# Altium PCB TRACKER.PcbDoc
Units mil, origin at the board's own origin, x right, y up, seen from the top; angles counter-clockwise.
Board outline 1250 x 1250 mil, 4 copper layers (Top Layer, MidLayer1, MidLayer2, Bottom Layer), stack 61 mil thick; 54 components, 50 nets, 221 pads, 73 vias.
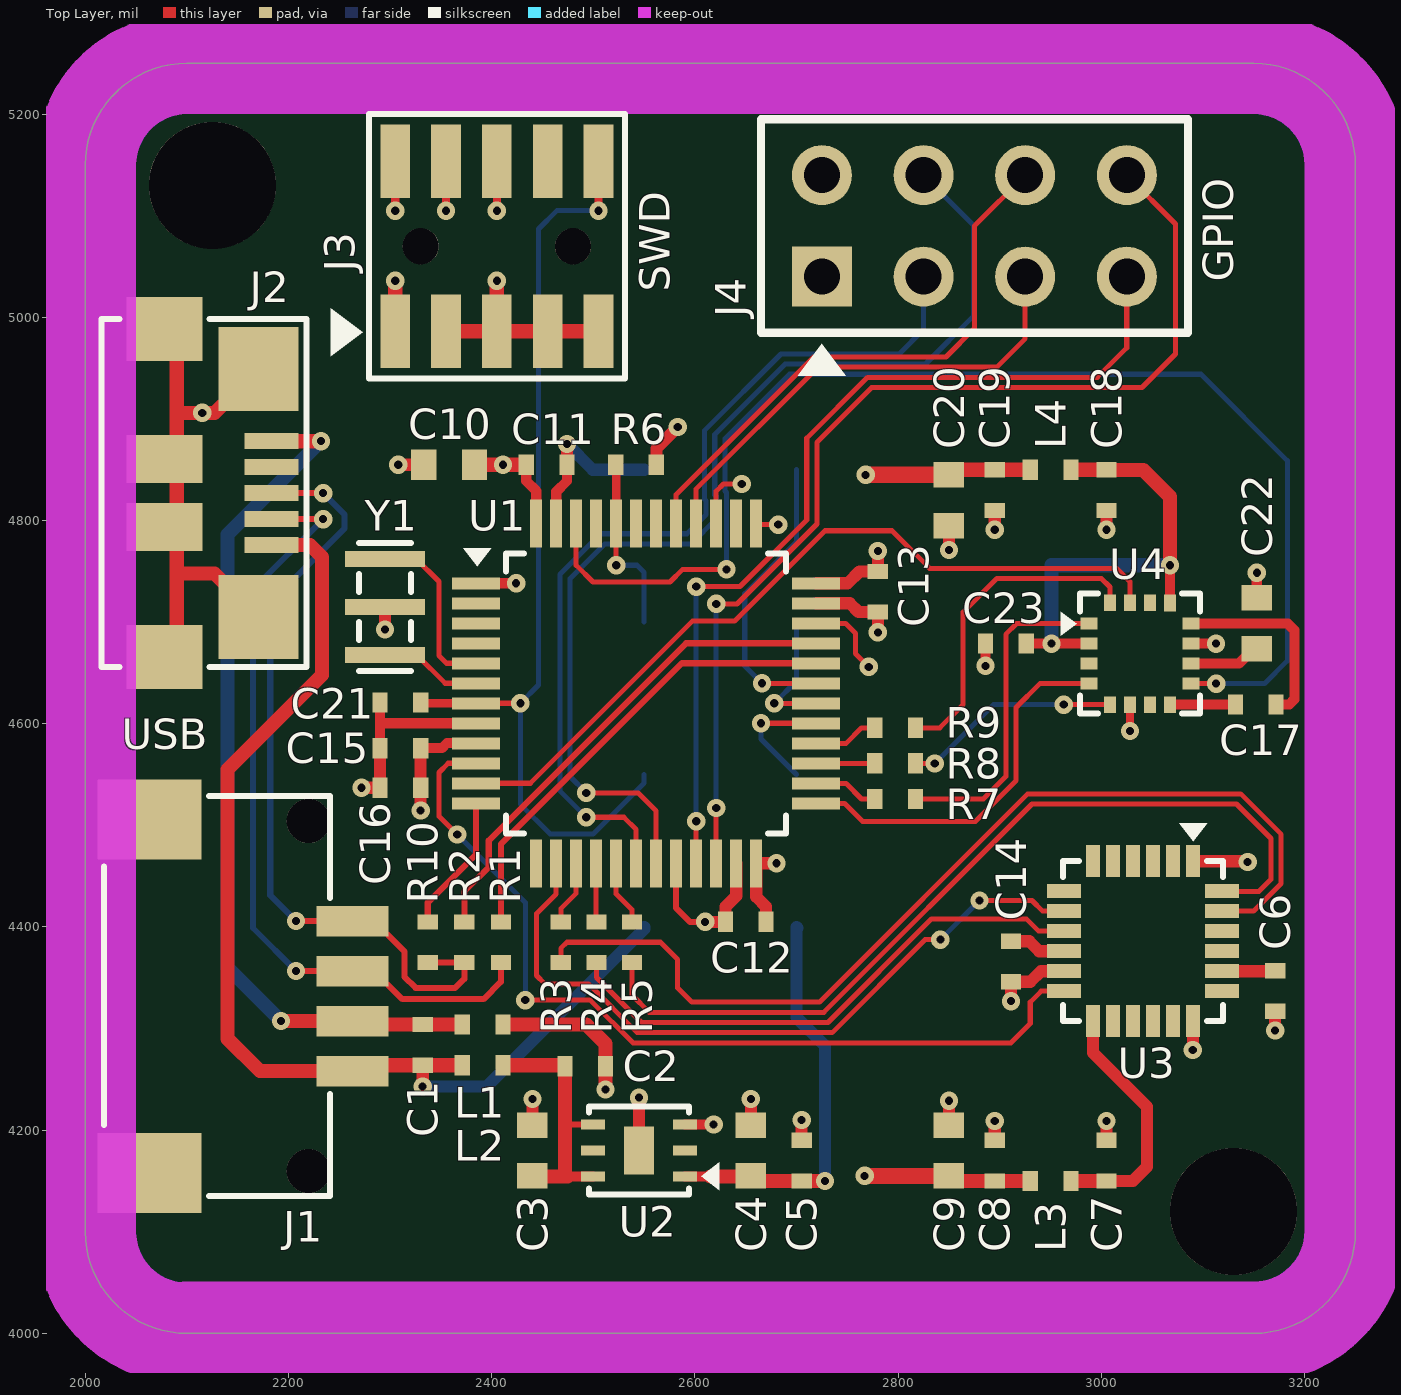
[diagram p0: Top Layer view]
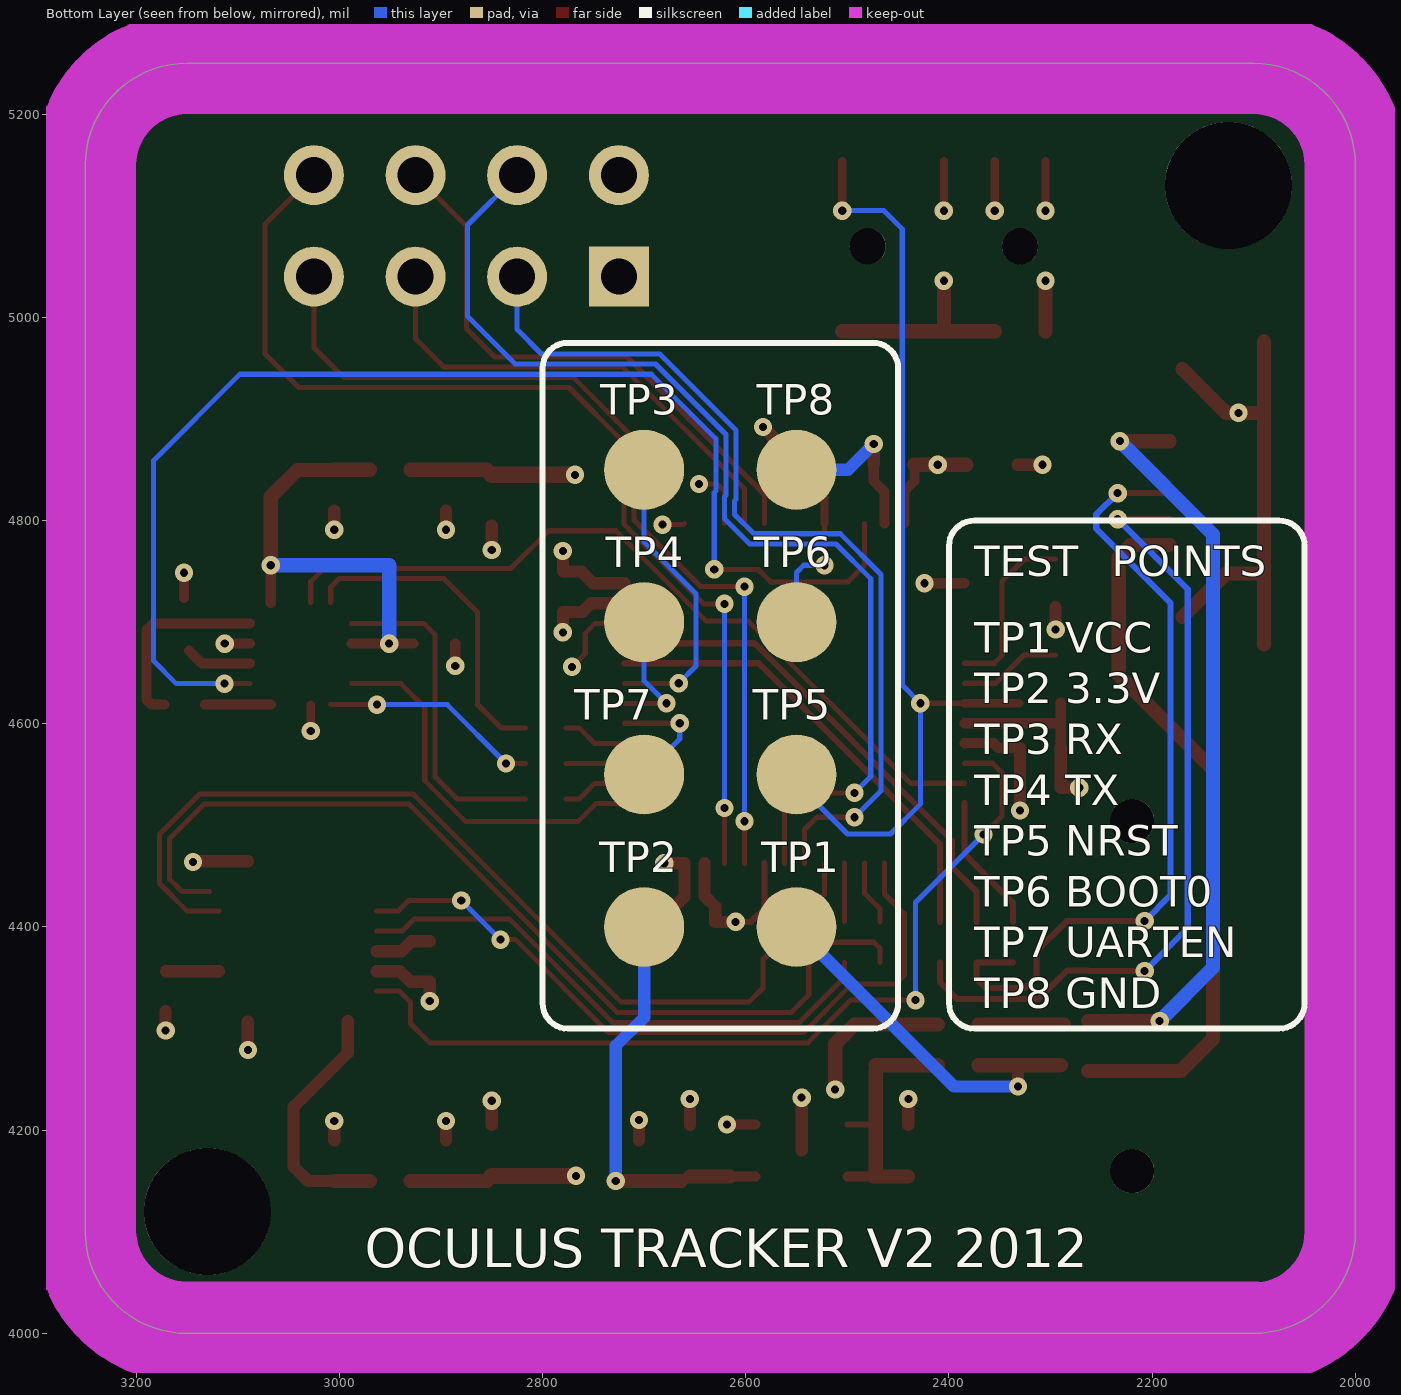
[diagram p1: Bottom Layer view, seen from below]
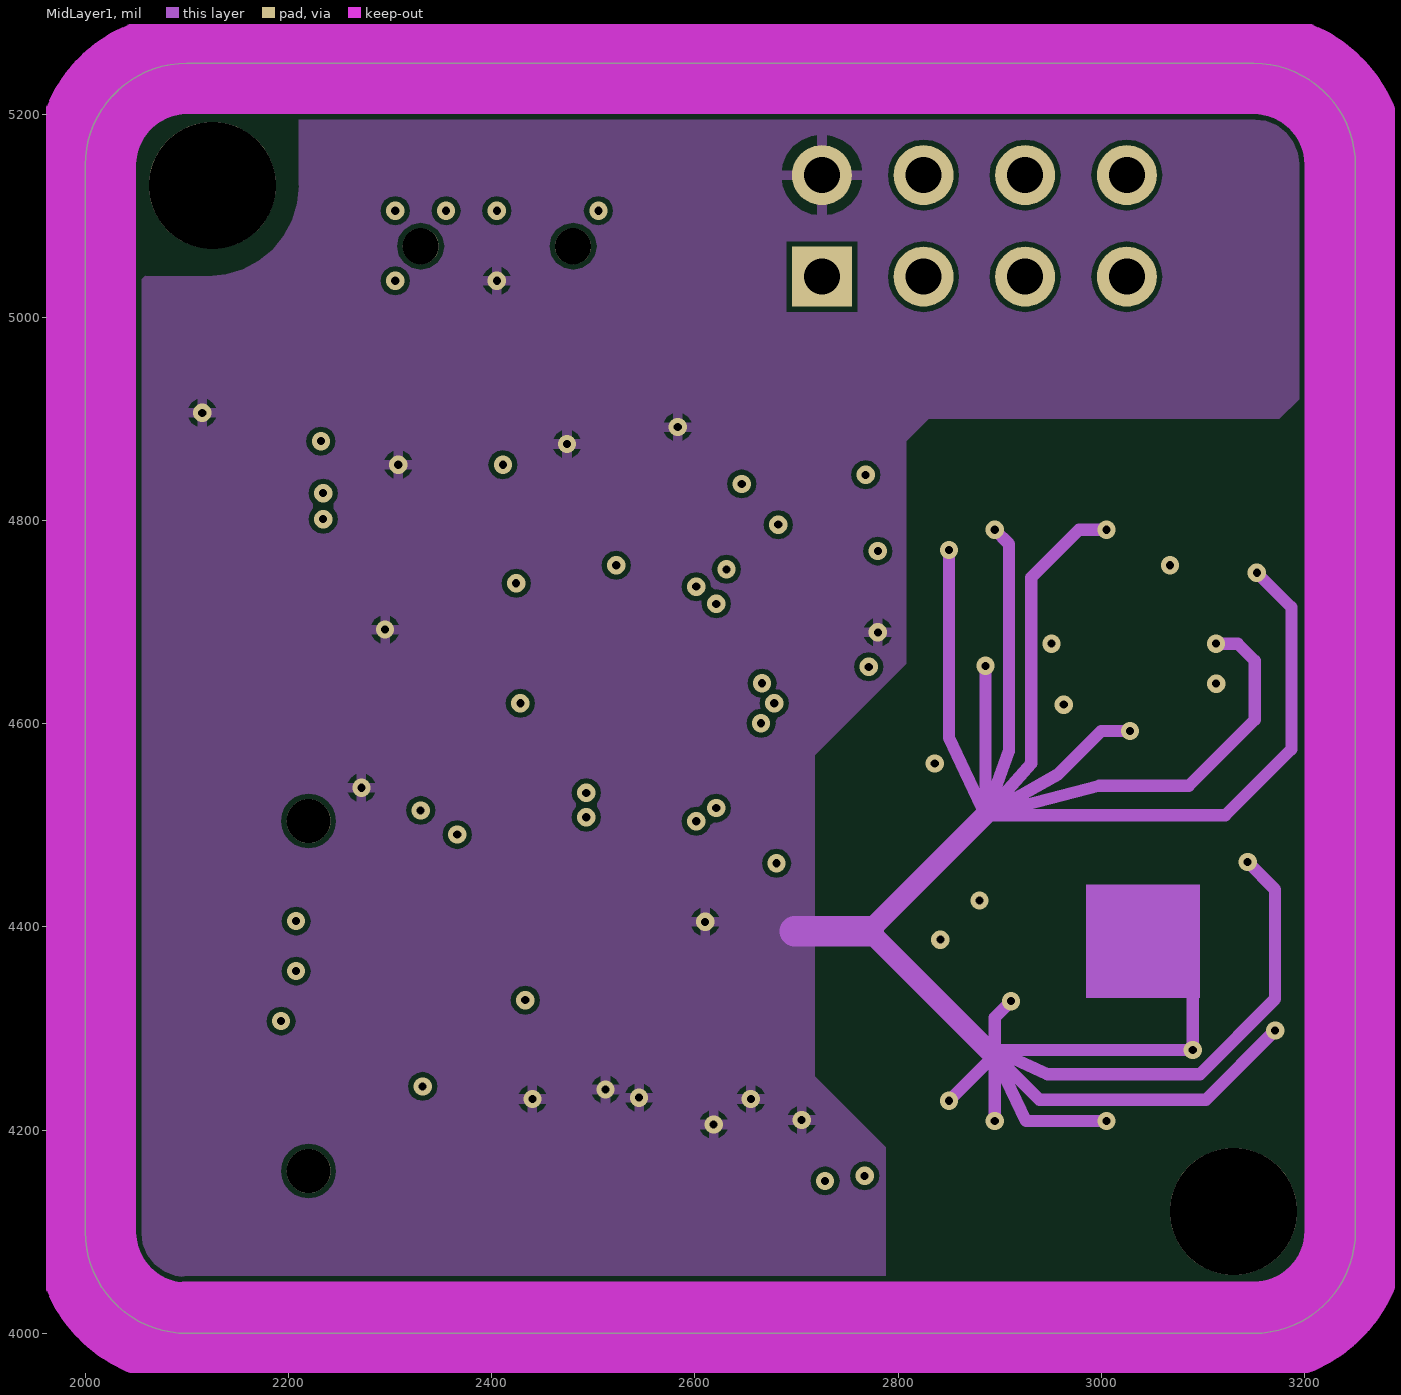
[diagram p2: MidLayer1]
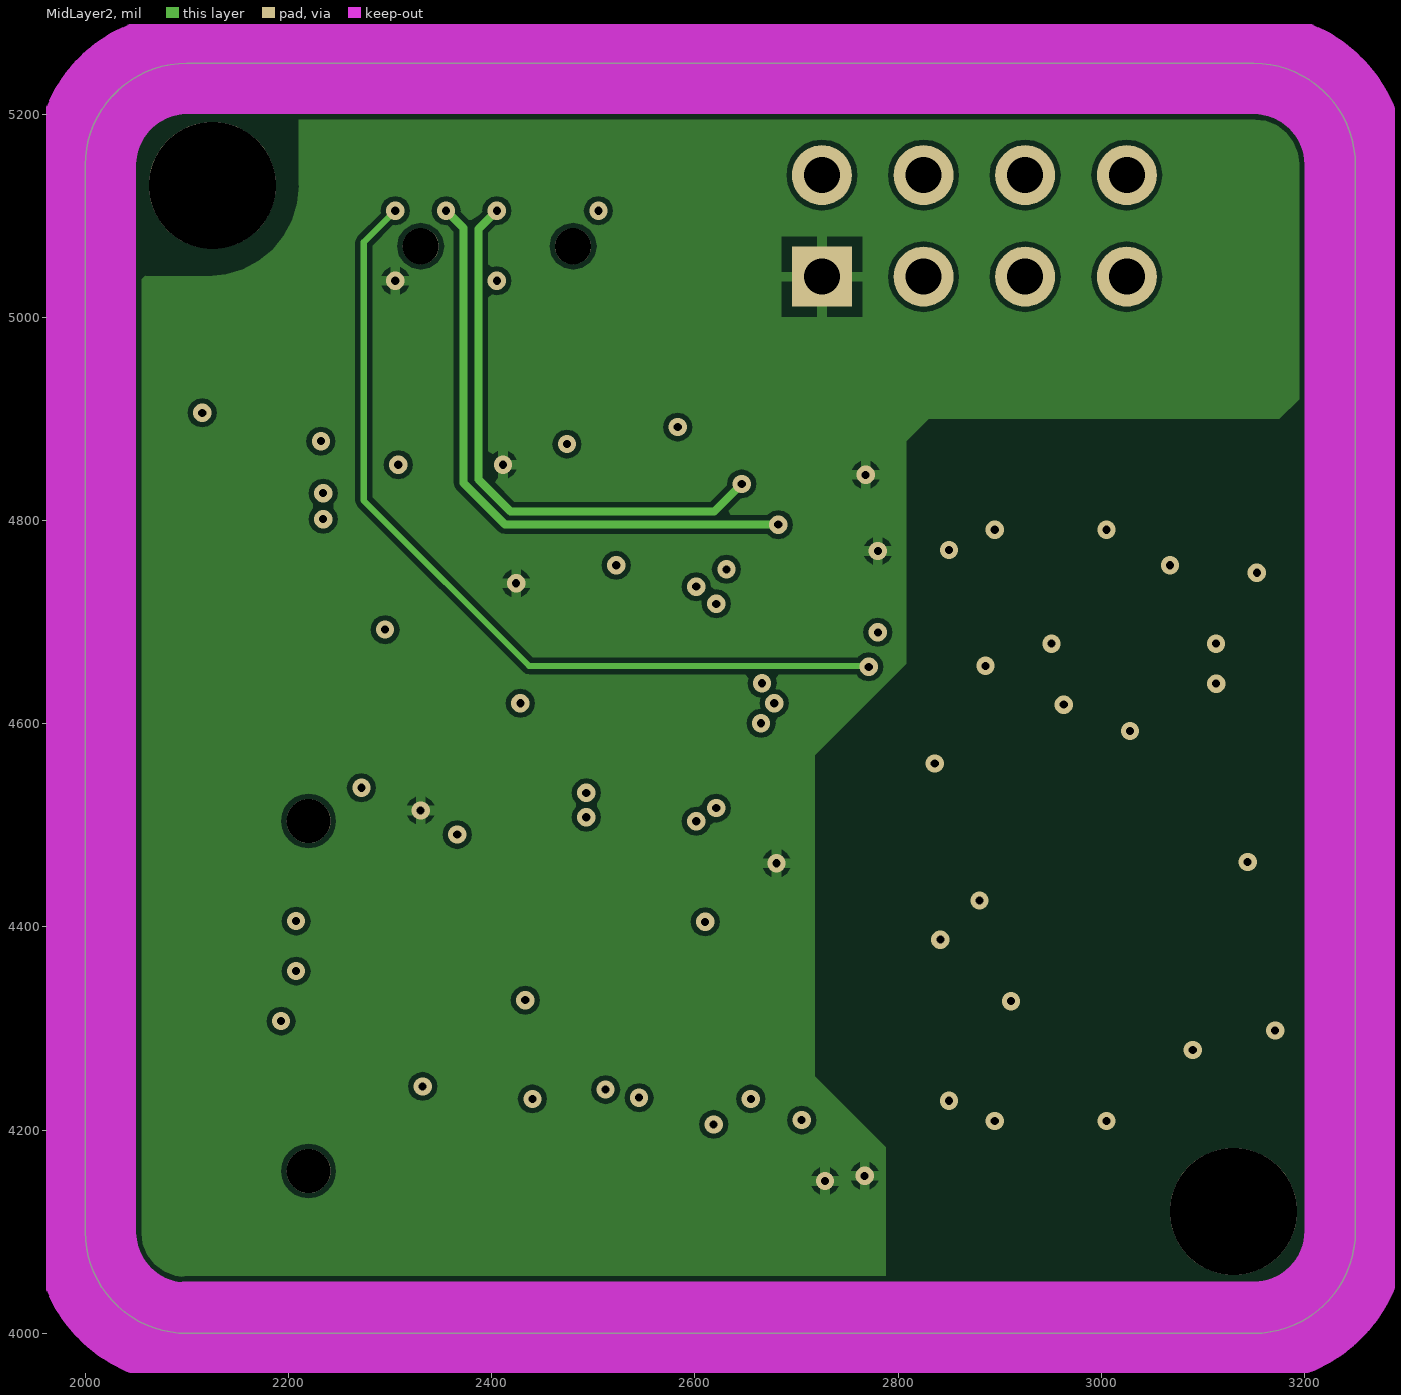
[diagram p3: MidLayer2]
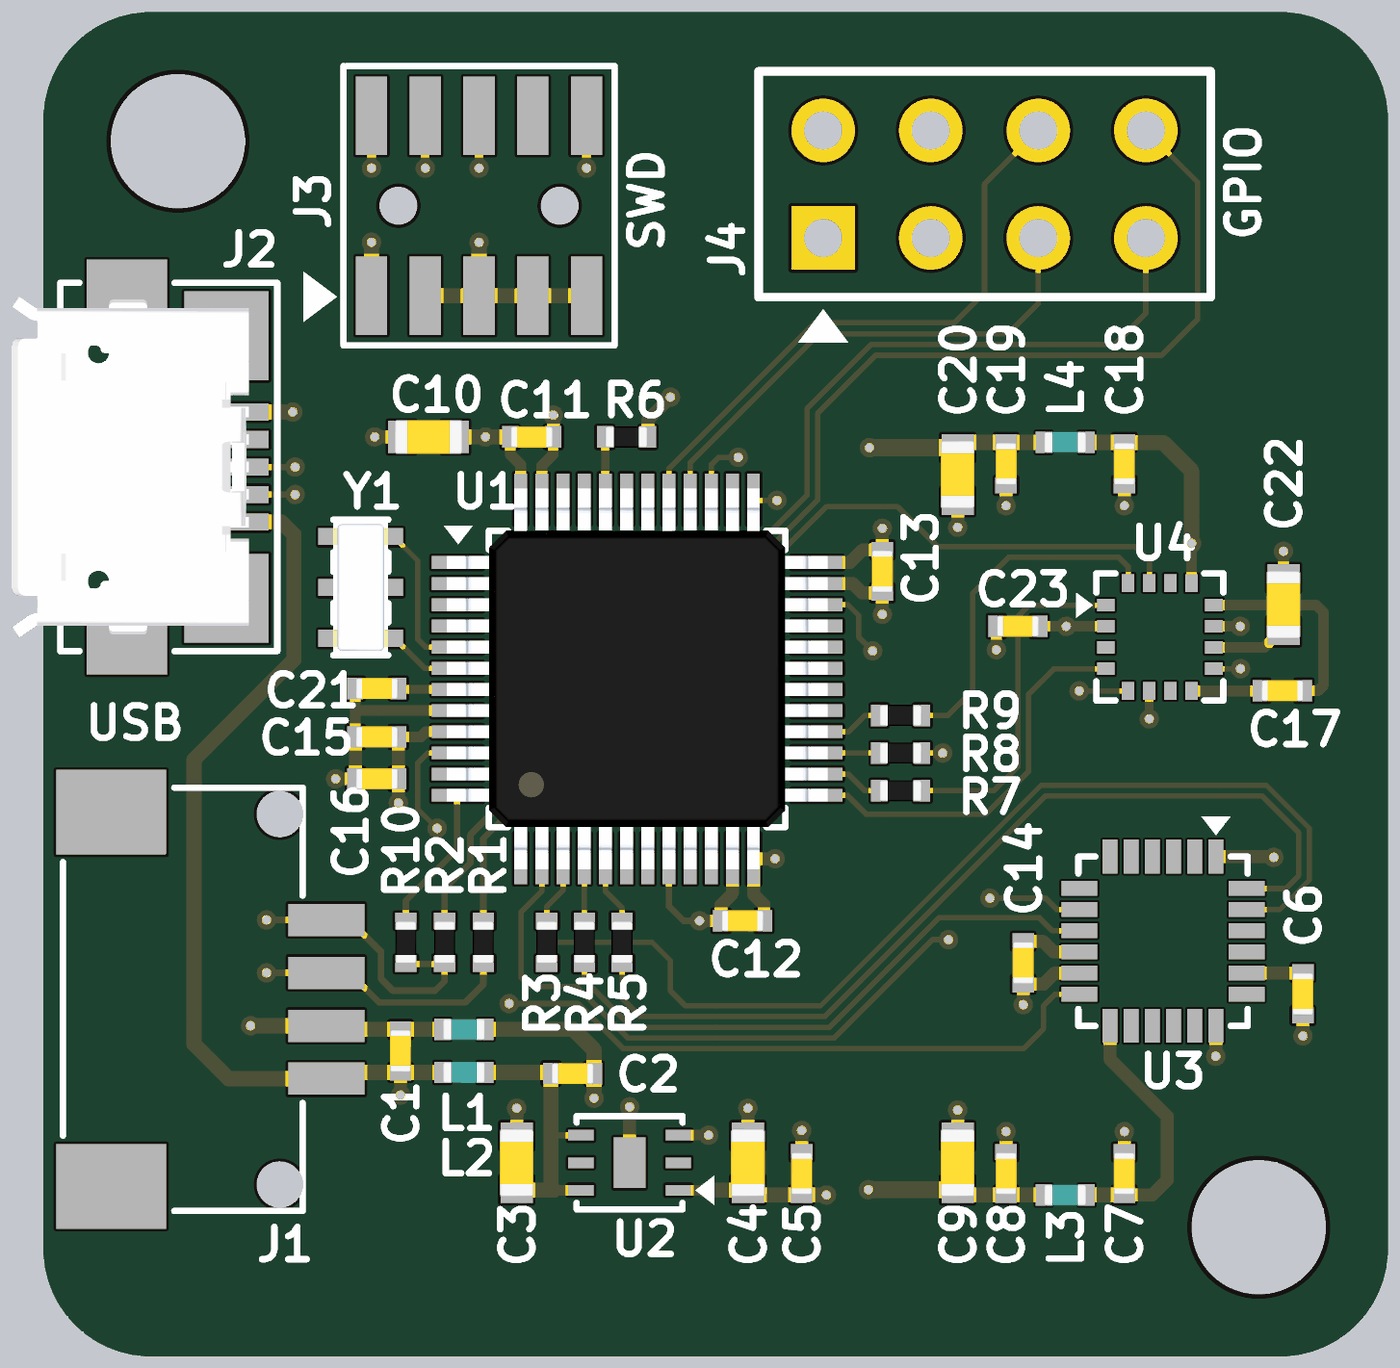
[diagram p4: 3D render of the assembled board from above, using the file's embedded part models]

## Layer stack, top to bottom
Top Layer: signal copper 1.6
Dielectric: core 17.3, Polyclad 370HR, Dk 4.4
MidLayer1: signal copper 1.6
Dielectric: prepreg 20, FR-4, Dk 4.8
MidLayer2: signal copper 1.6
Dielectric: core 17.3, FR-4, Dk 4.8
Bottom Layer: signal copper 1.6

## Board outline
2000,4100 2000,5150 cw(c2100,5150) 2100,5250 3150,5250 cw(c3150,5150) 3250,5150 3250,4100 cw(c3150,4100) 3150,4000 2100,4000 cw(c2100,4100)

## Design rules (kind name [scope] priority, off if disabled: settings)
Clearance "Pad Clearance" [IsPad vs IsPad] p1: gap=4
Clearance PolygonClearance [InPolygon] p2: gap=5
Clearance [All] p3: gap=5
ComponentClearance ComponentClearance_All [All] p1: gap=13 collisioncheckmode=3 verticalgap=0 showdistances=FALSE
DiffPairsRouting [All] p1: maxlimit=19.68 minlimit=3.94 mostfreqgap=3.94 maxuncoupledlength=500
FabricationTestPointUsage TestPointUsage [All] p1: valid=0 allowmultiple=FALSE
FabricationTestpoint Testpoint [All] p1: side=3 testpointundercomponent=TRUE minsize=40 maxsize=100 preferedsize=60 minholesize=0 maxholesize=40 preferedholesize=32 testpointgrid=1 allowsidetop=TRUE allowsidebottom=TRUE usegrid=TRUE gridtolerance=0.01
HoleSize [All] p1: absolutevalues=TRUE maxlimit=200 minlimit=7.9 maxpercent=80.000 minpercent=20.000
PlaneClearance [All] p1: clearance=10
PlaneConnect [All] p1: planeconnectstyle=Relief reliefexpansion=6 reliefentries=4 reliefconductorwidth=6 reliefairgap=6
PolygonConnect "PolygonConnect For Vias" [IsVia] p1: connectstyle=Relief reliefconductorwidth=10 reliefentries=4 polygonreliefangle="90 Angle" airgapwidth=5
PolygonConnect [All] p2: connectstyle=Relief reliefconductorwidth=10 reliefentries=4 polygonreliefangle="90 Angle" airgapwidth=10
RoutingCorners [All] p1: cornerstyle=45-Degree minsetback=78.74 maxsetback=78.74
RoutingVias [All] p1: holewidth=8 width=18 viastyle="Blind Buried (Adjacent Layers)" minholewidth=8 minwidth=18 maxholewidth=10 maxwidth=20
SilkscreenOverComponentPads [All] p1: minsilkscreentomaskgap=10
SolderMaskExpansion [All] p1: expansion=4
ViasUnderSMD [All] p1: allowed=TRUE
Width [All] p1: maxlimit=50 minlimit=4 preferedwidth=10
19 further rules are at their usual default settings.

## Components (designator, comment, footprint, x,y, rotation, side; value= is the part's Value field where it differs from the comment)
C1 "2200pF" CAP_CERAMIC_0402 2332,4284 r90 top
C2 "2200pF" CAP_CERAMIC_0402 2492,4263 r0 top
C3 "10uF" CAP_CERAMIC_0603 2440,4180 r90 top
C4 "10uF" CAP_CERAMIC_0603 2655,4180 r90 top
C5 "0.1uF" CAP_CERAMIC_0402 2705,4170 r90 top
C6 "2200pF" CAP_CERAMIC_0402 3171,4337 r270 top
C7 "2200pF" CAP_CERAMIC_0402 3005,4170 r90 top
C8 "0.1uF" CAP_CERAMIC_0402 2895,4170 r90 top
C9 "10uF" CAP_CERAMIC_0603 2850,4180 r90 top
C10 "10uF" CAP_CERAMIC_0603 2358,4855 r180 top
C11 "0.1uF" CAP_CERAMIC_0402 2454,4855 r0 top
C12 "0.1uF" CAP_CERAMIC_0402 2650,4405 r180 top
C13 "0.1uF" CAP_CERAMIC_0402 2780,4730 r270 top
C14 "0.1uF" CAP_CERAMIC_0402 2911,4366 r270 top
C15 "1uF" CAP_CERAMIC_0402 2310,4576 r180 top
C16 "0.1uF" CAP_CERAMIC_0402 2310,4537 r180 top
C17 "0.22uF" CAP_CERAMIC_0402 3152,4619 r0 top
C18 "2200pF" CAP_CERAMIC_0402 3005,4830 r270 top
C19 "0.1uF" CAP_CERAMIC_0402 2895,4830 r270 top
C20 "10uF" CAP_CERAMIC_0603 2850,4820 r270 top
C21 "0.1uF" CAP_CERAMIC_0402 2310,4621 r180 top
C22 "4.7uF" CAP_CERAMIC_0603 3153,4699 r90 top
C23 "0.1uF" CAP_CERAMIC_0402 2906,4679 r180 top
J1 "USB_HEADER" USB_HEADER 2163,4332 r270 top
J2 "ZX62-B-5PA(11)" ZX62-B-5PA(11) 2183,4827 r90 top
J3 "GRPB052VWQP-RC" GRPB052VWQP-RC 2405,5070 r90 top
J4 "4-103240-0-04" 4-103240-0-04 2725,5040 r0 top
L1 "MMZ1005S601C" INDUCTOR_0402 2391,4264 r0 top
L2 "MMZ1005S601C" INDUCTOR_0402 2391,4304 r0 top
L3 "MMZ1005S601C" INDUCTOR_0402 2950,4150 r180 top
L4 "MMZ1005S601C" INDUCTOR_0402 2950,4850 r180 top
R1 "22 ohm" RESISTOR_0402 2409,4385 r90 top
R2 "22 ohm" RESISTOR_0402 2373,4385 r90 top
R3 "22 ohm" RESISTOR_0402 2468,4385 r270 top
R4 "22 ohm" RESISTOR_0402 2503,4385 r270 top
R5 "22 ohm" RESISTOR_0402 2538,4385 r270 top
R6 "10K" RESISTOR_0402 2542,4855 r180 top
R7 "22 ohm" RESISTOR_0402 2797,4526 r0 top
R8 "22 ohm" RESISTOR_0402 2797,4561 r0 top
R9 "22 ohm" RESISTOR_0402 2797,4596 r0 top
R10 "1.5K" RESISTOR_0402 2337,4385 r90 top
TP1 "TEST POINT" TEST_POINT_PAD 2550,4400 r180 bottom
TP2 "TEST POINT" TEST_POINT_PAD 2700,4400 r180 bottom
TP3 "TEST POINT" TEST_POINT_PAD 2700,4850 r180 bottom
TP4 "TEST POINT" TEST_POINT_PAD 2700,4700 r180 bottom
TP5 "TEST POINT" TEST_POINT_PAD 2550,4550 r180 bottom
TP6 "TEST POINT" TEST_POINT_PAD 2550,4700 r180 bottom
TP7 "TEST POINT" TEST_POINT_PAD 2700,4550 r180 bottom
TP8 "TEST POINT" TEST_POINT_PAD 2550,4850 r180 bottom
U1 "STM32F103C8T6" LQFP48 2552,4630 r0 top
U2 "LP5900SD-3.3" LLP-6 2545,4180 r180 top
U3 "MPU-6000" QFN-24 3041,4386 r270 top
U4 "HMC5983" LPCC-16 3038,4669 r0 top
Y1 "CSTCE8M00G55-R0" CSTCE 2295,4715 r90 top

## Footprints (in the part's own frame and the unit in brackets; to place one, negate y for a bottom-side part, rotate by r counter-clockwise, add the part's x,y. Pads: shape width x height; smd on the part's side, far side on the other; paste and mask are expansions set on the pad)
4-103240-0-04 [mm]
  rect 1.5x1.5 hole 0.9 mask+0.076: 1(0,0)
  round 1.5 hole 0.9 mask+0.076: 2(0,2.54) 3(2.54,0) 4(2.54,2.54) 5(5.08,0) 6(5.08,2.54) 7(7.62,0) 8(7.62,2.54)
  silkscreen extent -1.52,-2.48 9.15,3.94
CAP_CERAMIC_0402 [mil]
  rect 15x20 smd mask+2.5: 1(-20,0) 2(20,0)
  body extent -20,-10 20,10, height 22
CAP_CERAMIC_0603 [mil]
  rect 25x30 smd mask+2.5: 1(-25,0) 2(25,0)
  body extent -31,-16 31,16, height 22
CSTCE [mm]
  rect 0.4x2 smd mask+0.064: 1(-1.2,0) 2(0,0) 3(1.2,0)
  silkscreen extent -1.6,-0.65 1.6,0.65, body extent -1.6,-0.65 1.6,0.65, height 0.7
GRPB052VWQP-RC [mm]
  round 0.9 hole 0.9 unplated mask+0.076: 0(0,1.905) 0(0,-1.905)
  rect 1.85x0.74 smd mask+0.064: 1(-2.125,2.54) 2(2.125,2.54) 3(-2.125,1.27) 4(2.125,1.27) 5(-2.125,0) 6(2.125,0) 7(-2.125,-1.27) 8(2.125,-1.27) 9(-2.125,-2.54) 10(2.125,-2.54)
  silkscreen extent -3.3,-3.2 3.3,4.15
INDUCTOR_0402 [mil]
  rect 15x20 smd mask+2: 1(-20,0) 2(20,0)
  body extent -20,-10 20,10, height 24
LLP-6 [mm]
  rect 0.6x0.25 smd mask+0.064: 1(-1.15,0.65) 2(-1.15,0) 3(-1.15,-0.65) 4(1.15,-0.65) 5(1.15,0) 6(1.15,0.65)
  rect 0.75x1.2 smd mask+0.064: 7(0,0)
  silkscreen extent -2,-1.1 1.25,1.1, body extent -1.25,-1.1 1.25,1.1, height 0.8
LPCC-16 [mm]
  rect 0.42x0.3 smd paste+0 mask+0.051: 1(-1.275,0.75) 2(-1.275,0.25) 3(-1.275,-0.25) 4(-1.275,-0.75) 9(1.275,-0.75) 10(1.275,-0.25) 11(1.275,0.25) 12(1.275,0.75)
  rect 0.3x0.42 smd paste+0 mask+0.051: 5(-0.75,-1.275) 6(-0.25,-1.275) 7(0.25,-1.275) 8(0.75,-1.275) 13(0.75,1.27) 14(0.25,1.275) 15(-0.25,1.275) 16(-0.75,1.275)
  silkscreen extent -1.97,-1.5 1.5,1.5, body extent -1.5,-1.5 1.5,1.5, height 1.5
LQFP48 [mm]
  rect 1.2x0.3 smd mask+0.064: 1(-4.25,2.75) 2(-4.25,2.25) 3(-4.25,1.75) 4(-4.25,1.25) 5(-4.25,0.75) 6(-4.25,0.25) 7(-4.25,-0.25) 8(-4.25,-0.75) 9(-4.25,-1.25) 10(-4.25,-1.75) 11(-4.25,-2.25) 12(-4.25,-2.75) 25(4.25,-2.75) 26(4.25,-2.25) 27(4.25,-1.75) 28(4.25,-1.25) 29(4.25,-0.75) 30(4.25,-0.25) 31(4.25,0.25) 32(4.25,0.75) 33(4.25,1.25) 34(4.25,1.75) 35(4.25,2.25) 36(4.25,2.75)
  rect 0.3x1.2 smd mask+0.064: 13(-2.75,-4.25) 14(-2.25,-4.25) 15(-1.75,-4.25) 16(-1.25,-4.25) 17(-0.75,-4.25) 18(-0.25,-4.25) 19(0.25,-4.25) 20(0.75,-4.25) 21(1.25,-4.25) 22(1.75,-4.25) 23(2.25,-4.25) 24(2.75,-4.25) 37(2.75,4.25) 38(2.25,4.25) 39(1.75,4.25) 40(1.25,4.25) 41(0.75,4.25) 42(0.25,4.25) 43(-0.25,4.25) 44(-0.75,4.25) 45(-1.25,4.25) 46(-1.75,4.25) 47(-2.25,4.25) 48(-2.75,4.25)
  silkscreen extent -4.58,-3.5 3.5,3.62, body extent -4.5,-4.5 4.5,4.5, height 1.5
QFN-24 [mm]
  rect 0.8x0.35 smd mask+0.051: 1(-2,1.25) 2(-2,0.75) 3(-2,0.25) 4(-2,-0.25) 5(-2,-0.75) 6(-2,-1.25) 13(2,-1.25) 14(2,-0.75) 15(2,-0.25) 16(2,0.25) 17(2,0.75) 18(2,1.25)
  rect 0.35x0.85 smd mask+0.051: 7(-1.25,-1.975) 8(-0.75,-1.975) 9(-0.25,-1.975) 10(0.25,-1.975) 11(0.75,-1.975) 12(1.25,-1.975) 19(1.25,1.975) 20(0.75,1.975) 21(0.25,1.975) 22(-0.25,1.975) 23(-0.75,1.975) 24(-1.25,1.975)
  silkscreen extent -2.95,-2 2,2, body extent -2,-2 2,2, height 0.9
RESISTOR_0402 [mil]
  rect 15x20 smd mask+2.5: 1(-20,0) 2(20,0)
  body extent -20,-10 20,10, height 15
TEST_POINT_PAD [mm]
  round 2 smd mask+0.064: 1(0,0)
USB_HEADER [mm]
  rect 2x2.6 smd mask+0.064: 0(-4.42,-2.54) 0(4.42,-2.54)
  round 1.1 hole 1.1 unplated mask+0.064: 0(-4.375,1.44) 0(4.375,1.44)
  rect 0.762x1.803 smd mask+0.064: 1(1.875,2.54) 2(0.625,2.54) 3(-0.625,2.54) 4(-1.875,2.54)
  silkscreen extent -5,-3.68 5,1.98
ZX62-B-5PA(11) [mm]
  rect 0.4x1.35 smd mask+0.064: 1(-1.3,0) 2(-0.65,0) 3(0,0) 4(0.65,0) 5(1.3,0)
  rect 2.1x2 smd mask+0.064: 6(-3.1,0.325) 7(3.1,0.325)
  rect 1.6x1.9 smd mask+0.064: 8(-4.1,2.675) 9(4.1,2.675)
  rect 1.2x1.9 smd mask+0.064: 8(-0.85,2.675) 9(0.85,2.675)
  silkscreen extent -4.35,-0.87 4.35,4.25, body extent -4.04,-0.2 4.04,5.4, height 2.79

## Part data
C1 C2 C6 C7 C18: library part "CAP, CERAMIC", "CAP, CERAMIC, 2200pF, ±10%, 50V, X7R, 0402"
C3 C4 C9 C10 C20: library part "CAP, CERAMIC", "CAP, CERAMIC, 10uF, ±20%, 6.3V, X5R, 0603"
C5 C8 C11 C12 C13 C14 C16 C19 C21 C23: library part "CAP, CERAMIC", "CAP, CERAMIC, 0.1uF, ±10%, 16V, X7R, 0402"
C15: library part "CAP, CERAMIC", "CAP, CERAMIC, 1uF, ±10%, 10V, X5R, 0402"
C17: library part "CAP, CERAMIC", "CAP, CERAMIC, 0.22uF, ±10%, 16V, X7R, 0402"
C22: library part "CAP, CERAMIC", "CAP, CERAMIC, 4.7uF, ±10%, 6.3V, X5R, 0603"
J1: "CONNECTOR, HEADER, 4 POS"
J2: "CONNECTOR, USB MICRO B, R/A, SMD"
J3: "CONNECTOR, 10 POS, ARM CORTEX SWD HEADER"
J4: "CONNECTOR, HEADER, 2X4, 0.1\" PITCH"
L1 L2 L3 L4: library part INDUCTOR, "FERRITE CHIP BEAD, 600 OHM @ 100MHz, 300mA, 0402"
R1 R2 R3 R4 R5 R7 R8 R9: library part RESISTOR, "RES, 22 OHM, 1/10W, ±1%, 0402"
R6: library part RESISTOR, "RES, 10K OHM, 1/10W, ±1%, 0402"
R10: library part RESISTOR, "RES, 1.5K OHM, 1/10W, ±1%, 0402"
TP1 TP2 TP3 TP4 TP5 TP6 TP7 TP8: library part TEST_POINT
U1: "IC, STM32 MICROCONTROLLER, ARM CORTEX M3"
U2: "IC, LINEAR REGULATOR, 3.3V, 150MA, ULTRA LOW NOISE"
U3: "IC, MEMS 3 AXIS GYROSCOPE AND 3 AXIS ACCELEROMETER"
U4: "IC, MEMS 3 AXIS MAGNETOMETER"
Y1: "CERAMIC RESONATOR, 8MHz, +/-0.2%, 33pF, SMD"

## Free pads (board coordinates)
  round 125 hole 125 unplated: 0(2125,5130) 0(3130,4120)

## Via types
v1: diameter 18, hole 8, Top Layer to Bottom Layer, tented both sides, 73 vias

## Nets (pads, with @x,y where several pads share a name; then routed paths per layer and width w, separated by ;. In a path a pad name is that pad's centre, name@x,y a point inside that pad or via, vN(x,y) a via of type N, cw(c..) or ccw(c..) an arc to the next point about the centre after c; other vN are vias at no path point)
3.3V: C4.1 C5.1 C8.1 C9.1 C10.1 C11.1 C12.1 C13.1 C15.1 C16.1 C19.1 C20.1 J3.1 J4.1 L3.2 L4.2 TP2.1 U1.1 U1.9 U1.24 U1.36 U1.48 U2.1 | length 1201.2
  Top Layer w9.8: U2.1 2615.59,4154.41
  Top Layer w10: C15.1@2329.68,4576 2351,4576 2356,4581 2384.46,4581 U1.9 ; U1.1 v1(2424,4738.27) ; C11.1 2434,4839 2443.73,4829.27 U1.48
  Top Layer w12: v1(2330,4514.69) C16.1 C15.1 ; C12.1 2670,4420 2660.27,4429.73 U1.24 v1(2680.27,4462.68) ; U1.36 2750.27,4738.27 2762,4750 C13.1 v1(2780,4770) ; C20.1 C20.1@2855,4850
  Top Layer w14: J3.1 v1(2305,5036) ; C10.1 C11.1 ; 2615.59,4154.41 C4.1@2655,4154.41 ; C4.1@2664,4150 v1(2728,4150) ; C9.1@2855,4150 C8.1 L3.2 ; C20.1@2855,4850 C19.1 L4.2
  Top Layer w16: v1(2767,4155) C9.1 ; v1(2768,4845) C20.1
  Bottom Layer w12: TP2.1@2701,4399 TP2.1 2700,4311 2728,4283 v1(2728,4150)
  other v1: 2411,4855
BOOT0: R6.2 TP6.1 U1.44 | length 178
  Top Layer w5: v1(2522.47,4756) U1.44
  Top Layer w8: U1.44 R6.2@2522.47,4854.53
  Bottom Layer w5: v1(2522.47,4756) 2543,4756 2550,4749 TP6.1
D+: J1.4 J2.3 R2.1 R10.1 | length 784.9
  Top Layer w6: J2.3 v1(2234,4827) ; v1(2207.39,4405.82) J1.4 2284.18,4405.82 2314,4376 2314,4351 2325,4340 2364,4340 2373,4349 R2.1 R10.1
  Bottom Layer w6: v1(2207.39,4405.82) 2182,4431.21 2182,4719 2255,4792 2255,4806 v1(2234,4827)
D-: J1.3 J2.2 R1.1 | length 781.4
  Top Layer w6: J2.2 v1(2234,4801.41) ; v1(2207.39,4356.61) J1.3 2263.39,4357 2284,4357 2312,4329 2392,4329 2409,4346 R1.1
  Bottom Layer w6: v1(2207.39,4356.61) 2165,4399 2165,4732.41 v1(2234,4801.41)
GND: C2.2 C3.2 C4.2 C5.2 C6.2 C7.2 C8.2 C9.2 C10.2 C11.2 C12.2 C13.2 C14.2 C15.2 C16.2 C18.2 C19.2 C20.2 C21.2 C22.2 C23.2 J2.6 J2.7 J2.8 J2.9 J3.3 J3.5 J3.7 J3.9 J4.2 L2.2 R6.1 TP8.1 U1.8 U1.20 U1.23 U1.35 U1.47 U2.3 U2.7 U3.1 U3.11 U3.18 U4.6 U4.11 Y1.2 | length 6008.8
  Top Layer w6: U1.20 2581.53,4418.47 2595,4405 v1(2610,4405)
  Top Layer w8: v1(3028.16,4592.84) U4.6
  Top Layer w9.8: U2.3 v1(2618.41,4205.59)
  Top Layer w10: C15.2 2290,4600.47 ; C21.2 2290,4600.47 ; U1.8 2290,4600.47 ; U1.47 2463.42,4828.42 2474,4839 C11.2 ; v1(2886,4657) C23.2 ; U4.11 v1(3112.84,4678.84) ; C22.2 v1(3153,4748.65)
  Top Layer w12: v1(2271.68,4537) C16.2 C15.2 ; v1(2295,4692.68) Y1.2 ; v1(2308,4855) C10.2@2332.68,4855 ; C3.2 v1(2440,4230.69) ; 2449,4303.69 2449.32,4304 ; C11.2@2474,4855.31 v1(2474,4875.31) ; U2.7@2544.84,4180.16 v1@2544.84,4232 ; R6.1@2562,4855.31 2562,4871 v1(2583,4892) ; v1(2610,4405) C12.2 2630,4420 2640.58,4430.58 U1.23 ; C4.2 v1(2655,4230.69) ; C5.2 v1(2705,4210) ; U1.35 2752.42,4718.58 2761,4710 C13.2 v1(2780,4690) ; C9.2 v1(2850,4229) ; v1(2850,4771) C20.2 ; C8.2 v1(2895,4209) ; v1(2895,4791) C19.2 ; v1(2911,4327) C14.2 2930,4346 2940.47,4356.47 U3.11 ; C7.2 v1(3005,4209) ; v1(3005,4791) C18.2 ; v1@3090.21,4279 U3.18@3090.21,4306.94 ; U3.1 v1@3141.74,4464.74 ; v1(3171,4298) C6.2
  Top Layer w14: J2.8@2090,4677.9 2090,4748 ; J2.9@2090,4976.1 2090,4906 ; J2.6 2127.16,4748 2090,4748 ; J2.7 2127.16,4906 v1(2115,4906) 2090,4906 ; J3.3 J3.5 ; v1(2405,5036) J3.5 ; L2.2 2493,4304 2512,4285 C2.2 v1(2512,4240) ; J3.9 J3.7 J3.5 ; 2090,4748 2090,4906
  MidLayer1 w12: v1(2850,4229) 2894.22,4273.22 2895,4274 ; v1(2850,4771) 2850,4586 2886,4510 ; 2886,4511 v1(2886,4657) ; v1(2895,4209) 2895,4272.43 2895,4274 ; v1(2895,4791) 2909,4777 2909,4573 2886,4510 ; v1(2911,4327) 2895,4311 2895,4279 ; v1(3005,4209) 2926,4209 2896.43,4271 2895,4274 ; v1(3005,4791) 2978,4791 2931,4744 2931,4561 2886,4510 ; v1(3028.16,4592.84) 2999.84,4592.84 2957,4550 2886,4510 ; 3090,4333 v1(3090,4279) 2895,4279 ; v1(3112.84,4678.84) 3134.16,4678.84 3151,4662 3151,4604 3086,4539 2998,4539 2886,4510 ; v1(3144,4464) 3171,4437 3171,4329 3097,4255 2947,4255 2895,4279 ; v1(3153,4748.65) 3187,4714.65 3187,4575 3122,4510 2886,4510 ; v1(3171,4298) 3103,4230 2939,4230 2895,4274
  MidLayer1 w20: 2771,4396 2886,4511 ; 2771.43,4396 2894.22,4273.22 2895,4272.43 2896.43,4271
  MidLayer1 w30: 2698,4396 2771,4396
  Bottom Layer w12: v1(2474,4875.31) 2499.32,4850 TP8.1
  other v1: 2545,4232
GYRO_CS: U1.14 U3.8 | length 722
  Top Layer w5: U1.14 2463.42,4432.42 2444,4413 2444,4352.14 2452.14,4344 2495.14,4344 2543.14,4296 2735,4296 2826.5,4387.5 v1(2841.5,4387.5) ; v1(2880,4426) 2931.77,4426 2942.24,4415.53 U3.8
  Bottom Layer w5: v1(2841.5,4387.5) v1(2880,4426) ; v1@2880.5,4425.5 v1(2880,4426) ; v1@2882,4426 v1(2880,4426)
GYRO_IRQ: U1.10 U3.12 | length 880.6
  Top Layer w5: v1(2366,4491) 2348,4509 2348,4552 2357.1,4561.1 U1.10 ; v1(2433,4328) 2497,4328 2539,4286 2911,4286 2930,4305 2930,4326 2940.79,4336.79 U3.12
  Bottom Layer w5: v1(2366,4491) 2433,4424 v1(2433,4328)
GYRO_MISO: R4.1 U1.16 | length 57.5
  Top Layer w5: R4.1@2502.79,4405.21 U1.16
GYRO_MOSI: R5.1 U1.17 | length 64.1
  Top Layer w5: U1.17 2522.47,4432.53 2538,4417 R5.1
GYRO_SCK: R3.1 U1.15 | length 63.9
  Top Layer w5: R3.1 2468,4418 2483.1,4433.1 U1.15
ICLK: J4.7 U1.21 | length 910.6
  Top Layer w5: U1.21 v1(2601.21,4504) ; v1(2601.21,4735) 2644.33,4735 2710,4800.67 2710,4881.14 2769.86,4941 2996,4941 3025,4970 J4.7
  Bottom Layer w5: v1(2601.21,4504) v1(2601.21,4735)
IDATA: J4.8 U1.22 | length 1052.2
  Top Layer w5: U1.22 v1(2620.9,4517) ; v1(2621,4718) 2641.48,4718 2720,4796.52 2720,4877 2774,4931 3040,4931 3073,4964 3073,5092 J4.8
  Bottom Layer w5: v1(2620.9,4517) v1@2620.9,4718
IO0: J4.3 U1.18 | length 897.6
  Top Layer w5: v1(2493,4508) 2530,4508 2542.16,4495.84 U1.18
  Bottom Layer w5: v1(2493,4508) 2467,4534 2467,4747 2507,4787 2592,4787 2611,4806 2611,4819.38 2609.5,4820.88 2609.5,4888.78 2684.72,4964 2801,4964 2825,4988 J4.3
IO1: J4.4 U1.19 | length 1059
  Top Layer w5: v1(2493,4532) 2544,4532 2561.84,4514.16 U1.19
  Bottom Layer w5: v1(2493,4532) 2477,4548 2477,4742.86 2511.14,4777 2596.14,4777 2621,4801.86 2621,4823.52 2619.5,4825.02 2619.5,4884.64 2688.86,4954 2827,4954 2874,5001 2874,5091 J4.4
IO3: J4.5 U1.40 | length 479.9
  Top Layer w5: U1.40 2601.21,4831.21 2721,4951 2897,4951 2925,4979 J4.5
IO4: J4.6 U1.41 | length 561.2
  Top Layer w5: U1.41 2581.53,4825.67 2716.86,4961 2847,4961 2875,4989 2875,5090 J4.6
MAG_CS: U1.25 U4.4 | length 374.1
  Top Layer w5: U1.25 2747.27,4521.73 2765,4504 2876,4504 2916,4544 2916,4616 2939.47,4639.47 U4.4
MAG_IRQ: U1.11 U4.15 | length 787.9
  Top Layer w5: U1.11 2437.86,4541.42 2597.44,4701 2639,4701 2728,4790 2794,4790 2831,4753 3015,4753 3028.16,4739.84 U4.15
MAG_MISO: R8.1 U1.27 | length 57.6
  Top Layer w5: U1.27 R8.1@2776.9,4561.1
MAG_MOSI: R9.1 U1.28 | length 64
  Top Layer w5: U1.28 2748.79,4580.79 2764,4596 R9.1
MAG_SCK: R7.1 U1.26 | length 64.1
  Top Layer w5: U1.26 2748.58,4541.42 2764,4526 R7.1
MAG_SOC: U1.46 U4.9 | length 1251.5
  Top Layer w5: U1.46 2483.1,4756 2499.6,4739.5 2575.5,4739.5 2588,4752 v1@2636,4752 ; U4.9 v1(3113,4639.47)
  Bottom Layer w5: v1(2631,4752) 2631,4827.67 2629.5,4829.17 2629.5,4880.5 2693,4944 3098,4944 3183,4859 3183,4662 3160.47,4639.47 v1(3113,4639.47)
NetC6_1: C6.1 U3.20 | length 51.7
  Top Layer w12: U3.20 C6.1@3170.47,4356.47
NetC7_1: C7.1 L3.1 U3.13 | length 246.1
  Top Layer w12: U3.13 2991.79,4276.21 3045,4223 3045,4164 3031,4150 C7.1
  Top Layer w14: L3.1 C7.1
NetC14_1: C14.1 U3.10 | length 56.3
  Top Layer w12: C14.1 2929,4386 2938.84,4376.16 U3.10
NetC17_1: C17.1 U4.8 | length 64.6
  Top Layer w10: U4.8 3131.8,4618.8 C17.1
NetC17_2: C17.2 U4.12 | length 192.6
  Top Layer w10: U4.12 3183.47,4698.53 3190,4692 3190,4624 3185,4619 C17.2
NetC18_1: C18.1 C23.1 L4.1 U4.2 U4.13 | length 467.3
  Top Layer w10: C23.1@2927,4678.84 U4.2 ; U4.13 v1(3067.53,4756)
  Top Layer w14: L4.1 C18.1 ; C18.1@3005,4849.69 3041.31,4849.69 3067.53,4823.47 v1(3067.53,4756)
  Bottom Layer w14: v1(2951,4678.84) 2951,4756 v1(3067.53,4756)
NetC22_1: C22.1 U4.10 | length 65.1
  Top Layer w10: U4.10 3135.16,4659.16 C22.1@3148,4672
NetR3_2: R3.2 U3.23 | length 985.6
  Top Layer w5: R3.2 2468,4379 2474,4385 2566,4385 2583,4368 2583,4340 2597,4326 2722.57,4326 2927.57,4531 3137.14,4531 3177,4491.14 3177,4442.86 3149.67,4415.53 U3.23
NetR4_2: R4.2 U3.9 | length 540.6
  Top Layer w5: R4.2 2503,4350.28 2547.28,4306 2730.86,4306 2832.86,4408 2926.09,4408 2938.25,4395.84 U3.9
NetR5_2: R5.2 U3.24 | length 851
  Top Layer w5: R5.2 2538,4333 2555,4316 2726.72,4316 2931.72,4521 3133,4521 3167,4487 3167,4447 3155,4435 U3.24@3128,4435
NetR7_2: R7.2 U4.1 | length 324.2
  Top Layer w5: R7.2 2883.86,4526 2906,4548.14 2906,4688 2916.53,4698.53 U4.1
NetR8_2: R8.2 U4.5 | length 218.9
  Top Layer w5: R8.2 v1(2836,4561) ; v1@2960,4620 2961.2,4618.8 U4.5
  Bottom Layer w5: v1(2836,4561) 2893.8,4618.8 v1(2963,4618.8)
NetR9_2: R9.2 U4.16 | length 324.4
  Top Layer w5: R9.2 2841,4596 2864,4619 2864,4709.86 2897.14,4743 3000,4743 3008.47,4734.53 U4.16
NRST: C21.1 J3.10 TP5.1 U1.7 | length 950.3
  Top Layer w5: U1.7@2383.35,4620.16 U1.7 v1@2428,4620.16
  Top Layer w8: C21.1@2330.84,4620.16 U1.7 ; v1(2505,5105) J3.10
  Bottom Layer w5: v1(2505,5105) 2464,5105 2446,5087 2446,4638.16 2428.16,4620.32 2428.16,4520.84 2457.5,4491.5 2499.83,4491.5 2550,4541.67 TP5.1
  other v1: 2428.16,4620.16
OSC_IN: U1.5 Y1.3 | length 175
  Top Layer w5: Y1.3 2325.76,4762.24 2348,4740 2348,4667 2355.47,4659.53 U1.5
OSC_OUT: U1.6 Y1.1 | length 101.2
  Top Layer w5: Y1.1 2326.24,4667.76 2354.16,4639.84 U1.6
RX: TP3.1 U1.31 | length 291.6
  Top Layer w5: v1(2666,4639.84) U1.31
  Bottom Layer w5: v1(2666,4639.84) 2649,4656.84 2649,4728 2700,4779 TP3.1
SWCLK: J3.4 U1.37 | length 673
  Top Layer w5: U1.37 2661.59,4796 v1(2682,4796)
  Top Layer w8: v1(2355,5105) J3.4
  MidLayer2 w8: v1(2355,5105) 2372,5088 2372,4837 2413,4796 v1(2682,4796)
SWDIO: J3.2 U1.34 | length 992.8
  Top Layer w5: U1.34 2748.1,4698.9 2758,4689 2758,4669 v1(2771,4656)
  Top Layer w8: v1(2305,5105) J3.2
  MidLayer2 w6: v1(2305,5105) 2274,5074 2274,4819.59 2436.75,4656.84 2770.16,4656.84 v1(2771,4656)
SWO: J3.6 U1.39 | length 663.5
  Top Layer w5: U1.39 2620.9,4828.9 2628,4836 v1(2646,4836)
  Top Layer w8: v1(2405,5105) J3.6
  MidLayer2 w8: v1(2405,5105) 2387,5087 2387,4840.38 2418.38,4809 2619,4809 v1(2646,4836)
TX: TP4.1 U1.30 | length 130.3
  Top Layer w5: v1(2678,4620.16) U1.30
  Bottom Layer w5: v1(2678,4620.16) 2700,4642.16 TP4.1
UARTEN: TP7.1 U1.29 | length 119.3
  Top Layer w5: v1(2665,4600.47) U1.29
  Bottom Layer w5: v1(2665,4600.47) 2665,4585 TP7.1
USB_GND: C1.2 J1.2 J2.5 L2.1 | length 833.8
  Top Layer w14: J2.5 v1(2231.82,4878.18) ; v1(2192.61,4307.39) J1.2 ; J1.2@2287,4304 C1.2 L2.1
  Bottom Layer w14: v1(2192.61,4307.39) 2140,4360 2140,4786.36 v1(2231.82,4878.18)
USBDM: R1.2 U1.32 | length 460.5
  Top Layer w6: R1.2 2409,4481.44 2587.08,4659.53 U1.32
USBDP: R2.2 U1.33 | length 492.7
  Top Layer w6: R2.2 2373,4435 2397,4459 2397,4485 2591.21,4679.21 U1.33
USBDP_PU: R10.2 U1.12 | length 136.5
  Top Layer w6: R10.2 2337,4424 2384.68,4471.68 U1.12
VCC: C1.1 J1.1 J2.1 L1.1 TP1.1 | length 1089.8
  Top Layer w12: v1(2332,4243) C1.1
  Top Layer w14: J2.1 2221.18,4775.82 2233,4764 2233,4648 2140,4555 2140,4290 2171.82,4258.18 J1.1 ; J1.1@2290,4264 C1.1 L1.1
  Bottom Layer w12: v1(2332,4243) 2395,4243 2550,4398 TP1.1
VUSB: C2.1 C3.1 L1.2 U2.4 U2.6 | length 245.1
  Top Layer w6: 2479.59,4205.59 U2.4
  Top Layer w9.8: 2474.41,4154.41 U2.6
  Top Layer w14: L1.2 C2.1@2472,4264 ; C3.1@2440.59,4154.41 2469,4154.41 ; C2.1@2472,4258 2472,4157.41 2469,4154.41 ; 2474.41,4154.41 2469,4154.41
pads on no net: J1.0 J2.4 J3.0 J3.8 U1.2 U1.3 U1.4 U1.13 U1.38 U1.42 U1.43 U1.45 U2.2 U2.5 U3.2 U3.3 U3.4 U3.5 U3.6 U3.7 U3.14 U3.15 U3.16 U3.17 U3.19 U3.21 U3.22 U4.3 U4.7 U4.14

## Polygon pours and split planes (outlines as drawn)
GND on MidLayer1 "Ground Layer" (solid, pour order 6): 2000,4100 ccw(c2100,4100) 2100,4000 3150,4000 ccw(c3150,4100) 3250,4100 3250,4110 3250,5150 ccw(c3150,5150) 3150,5250 2100,5250 ccw(c2100,5150) 2000,5150 2000,5140
3.3V on MidLayer2 "Power Layer" (solid, pour order 5): 2000,4100 ccw(c2100,4100) 2100,4000 3150,4000 ccw(c3150,4100) 3250,4100 3250,4110 3250,5150 ccw(c3150,5150) 3150,5250 2100,5250 ccw(c2100,5150) 2000,5150 2000,5140

## Keep-outs
Keep-Out Layer:
  lines w100: 2100,4000 cw(c2100,4100) 2000,4100 2000,5150 cw(c2100,5150) 2100,5250 3150,5250 cw(c3150,5150) 3250,5150 3250,4100 ; 2100,4001 3150,4001 ccw(c3150,4101) 3250,4101

## Other copper
MidLayer1:
  rectangle net GND: 2985,4330 3097,4442
  pour cut-out: 2830,4900.03 2808,4878 2808,4659.03 2718,4569.03 2718,4253.03 2788,4183.03 2788,4049.03 3200,4049.03 3200,4925 3175,4900
  pour cut-out: 2045,5040 cw(c2046,5040) 2046,5041 2121,5041 ccw(c2121,5130) 2210,5130 2210,5195 2045,5195
MidLayer2:
  pour cut-out: 2830,4900.03 2808,4878 2808,4659.03 2718,4569.03 2718,4253.03 2788,4183.03 2788,4049.03 3200,4049.03 3200,4925 3175,4900
  pour cut-out: 2045,5040 cw(c2046,5040) 2046,5041 2121,5041 ccw(c2121,5130) 2210,5130 2210,5195 2045,5195

## Silkscreen, mask and mechanical layers (free items; w line width, h text height)
Top Overlay:
  text "GPIO" at 3130,5035 h30 r90
  text "SWD" at 2575,5025 h30 r90
  text "USB" at 2036,4575 h30
Bottom Overlay:
  lines w5.91: 2050,4325 ccw(c2075,4325) 2075,4300 2375,4300 ccw(c2375,4325) 2400,4325 2400,4775 ccw(c2375,4775) 2375,4800 2075,4800 ccw(c2075,4775) 2050,4775 2050,4325 ; 2450,4325 ccw(c2475,4325) 2475,4300 2775,4300 ccw(c2775,4325) 2800,4325 2800,4950 ccw(c2775,4950) 2775,4975 2475,4975 ccw(c2475,4950) 2450,4950 2450,4325
  text "POINTS" at 2240,4745 h30
  text "TEST" at 2375,4745 h30
  text "TP1 VCC" at 2375,4670 h30
  text "TP2 3.3V" at 2375,4620 h30
  text "TP3 RX" at 2375,4570 h30
  text "TP4 TX" at 2375,4520 h30
  text "TP5 NRST" at 2375,4470 h30
  text "TP6 BOOT0" at 2375,4420 h30
  text "TP7 UARTEN" at 2375,4370 h30
  text "TP8 GND" at 2375,4320 h30
  text "OCULUS TRACKER V2 2012" at 2975,4065 h38
Board Outline:
  the board outline again, w10
Mechanical Ref:
  lines w5: 2000,4625 3250,4625 ; 2625,4000 2625,5250